# Altium PCB AD.PcbDoc
Units mm, origin at the board's own origin, x right, y up, seen from the top; angles counter-clockwise.
Board outline 130.05 x 90.05 mm, 2 copper layers (Top Layer, Bottom Layer); 7 components, 14 nets, 109 pads, 0 vias.
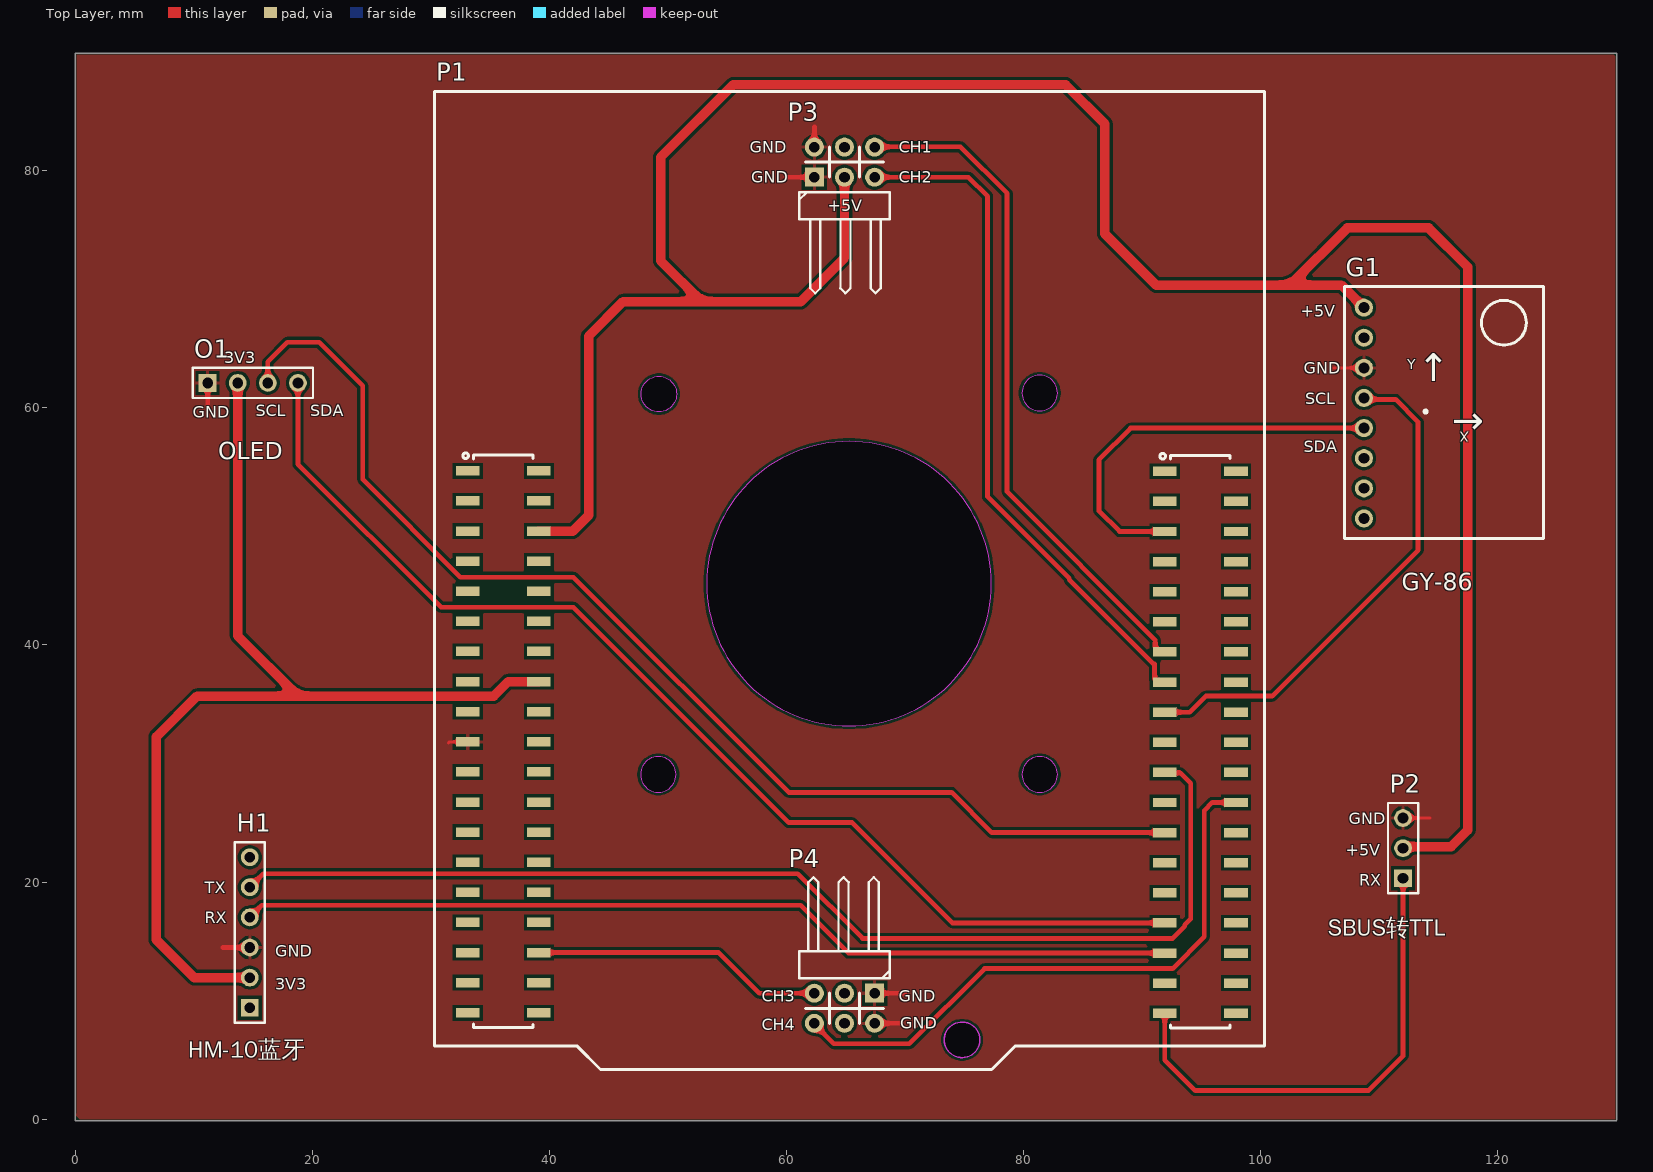
[diagram p0: Top Layer view]
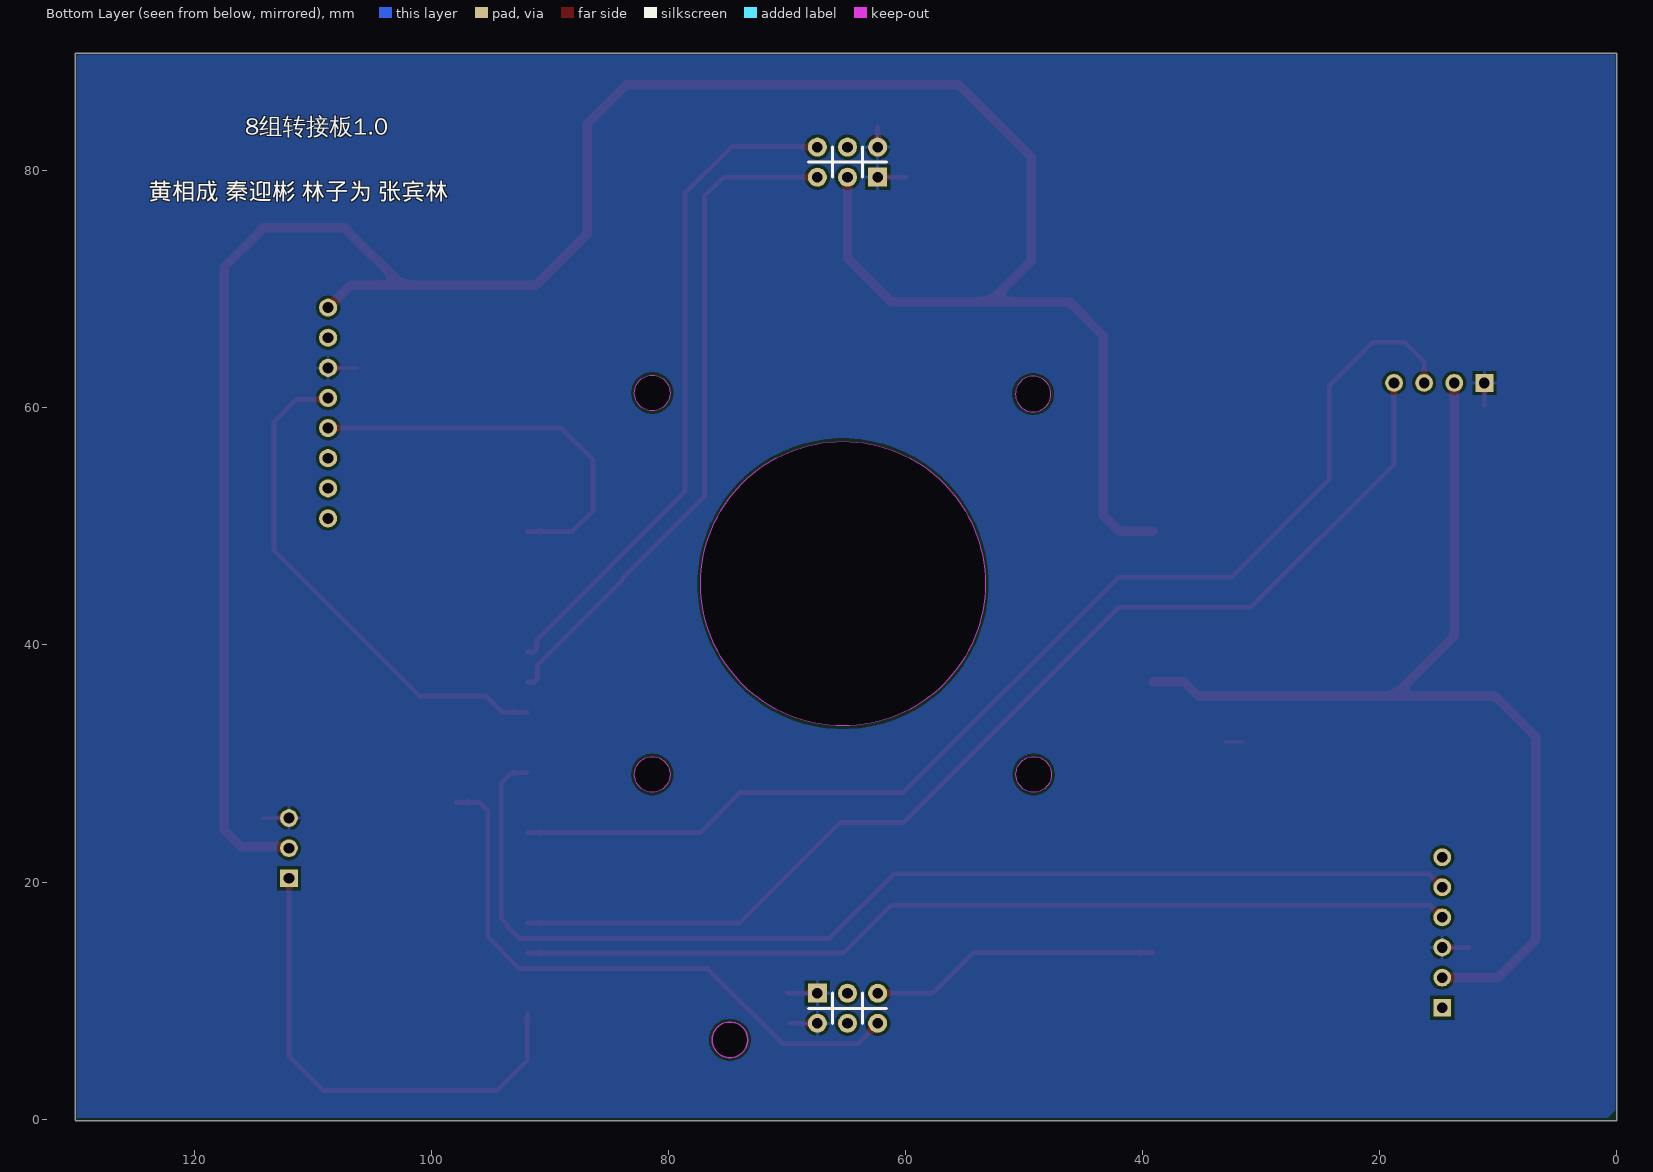
[diagram p1: Bottom Layer view, seen from below]

## Layer stack, top to bottom
Top Solder: solder mask 0.0102, Solder Resist, Dk 3.5
Top Layer: signal copper 0.0356
Dielectric 1: dielectric 0.32, FR-4, Dk 4.8
Bottom Layer: signal copper 0.0356
Bottom Solder: solder mask 0.0102, Solder Resist, Dk 3.5

## Board outline
0,-0.127 130,-0.127 130.048,-0.079 130.048,89.921 130,89.916 0,89.916
cut-out: 49.237,59.661 cw(c49.237,61.161) 47.737,61.161 cw(c49.237,61.161) 49.237,62.661 cw(c49.237,61.161) 50.737,61.161 cw(c49.237,61.161)
cut-out: 47.691,29.079 ccw(c49.191,29.079) 49.191,27.579 ccw(c49.191,29.079) 50.691,29.079 ccw(c49.191,29.079) 49.191,30.579 ccw(c49.191,29.079)
cut-out: 79.865,61.253 ccw(c81.365,61.253) 81.365,59.753 ccw(c81.365,61.253) 82.865,61.253 ccw(c81.365,61.253) 81.365,62.753 ccw(c81.365,61.253)
cut-out: 79.865,29.079 ccw(c81.365,29.079) 81.365,27.579 ccw(c81.365,29.079) 82.865,29.079 ccw(c81.365,29.079) 81.365,30.579 ccw(c81.365,29.079)
cut-out: 53.278,45.166 ccw(c65.278,45.166) 65.278,33.166 ccw(c65.278,45.166) 77.278,45.166 ccw(c65.278,45.166) 65.278,57.166 ccw(c65.278,45.166)

## Design rules (kind name [scope] priority, off if disabled: settings)
Clearance GND_Polygon_Clearance [InNet('GND')] p1: gap=0.25 ignorepadtopadclearanceinfootprint=FALSE
Clearance [All] p2: gap=0.2 ignorepadtopadclearanceinfootprint=FALSE
PolygonConnect PolygonGND [InNet('GND')] p1: connectstyle=Relief reliefconductorwidth=0.3 reliefentries=4 polygonreliefangle="90 Angle" airgapwidth=0.25
PolygonConnect [All] p2: connectstyle=Relief reliefconductorwidth=0.254 reliefentries=4 polygonreliefangle="90 Angle" airgapwidth=0.254
RoutingVias [All] p1: holewidth=0.3 width=0.6 viastyle="Through Hole" minholewidth=0.3 minwidth=0.5 maxholewidth=0.8 maxwidth=1
SolderMaskExpansion [All] p1: expansion=0.102 istentingtop=FALSE
SupplyNets "Schematic Supply Nets_2" [InNet('+3V3')] p1: voltage=0.000
SupplyNets "Schematic Supply Nets_1" [InNet('+5')] p2: voltage=0.000
SupplyNets "Schematic Supply Nets" [InNet('GND')] p3: voltage=0.000
Width Width_PWR [InNetClass('PWR')] p1: maxlimit=2 minlimit=0.2 preferedwidth=0.8
Width Width_INF [InNetClass('INF')] p2: maxlimit=0.4 minlimit=0.2 preferedwidth=0.2
Width Width_PWM [InNetClass('PWM')] p3: maxlimit=0.4 minlimit=0.2 preferedwidth=0.2
Width [All] p4: maxlimit=0.254 minlimit=0.254 preferedwidth=0.254
30 further rules are at their usual default settings.

## Classes and differential pairs
net class PWM: TIM3_CH1 TIM3_CH2 TIM3_CH3 TIM3_CH4
net class INF: I2C1_SCL I2C1_SDA I2C2_SCL I2C2_SDA USART1_RX USART1_TX USART2_RX
net class PWR: +3V3 +5 GND

## Components (designator, comment, footprint, x,y, rotation, side; value= is the part's Value field where it differs from the comment)
G1 "GY-86" GY-86 113.792,59.563 r0 top
H1 "HM-10" HDR1X6 14.732,9.398 r90 top
O1 "OLED" HDR1X4 11.176,62.103 r0 top
P1 "NUCLEO-64" NUCLEO-F103RB 100.316,86.691 r270 top
P2 "SBUS转TTL" HDR1X3 112.014,20.32 r90 top
P3 "PWM" HDR2.54-WI-2x3P 64.897,80.726 r0 top
P4 "PWM" HDR2.54-WI-2x3P 64.897,9.352 r180 top

## Footprints (in the part's own frame and the unit in brackets; to place one, negate y for a bottom-side part, rotate by r counter-clockwise, add the part's x,y. Pads: shape width x height; smd on the part's side, far side on the other; paste and mask are expansions set on the pad)
GY-86 [mil]
  round 60 hole 36: 1(-200,350) 2(-200,250) 3(-200,150) 4(-200,50) 5(-200,-50) 6(-200,-150) 7(-200,-250) 8(-200,-350)
  silkscreen extent -265,-416 396,420
HDR1X3 [mm] "Connector; Header; 3 Position"
  rect 1.5x1.5 hole 0.9: 1(0,0)
  round 1.5 hole 0.9: 2(2.54,0) 3(5.08,0)
  silkscreen extent -1.27,-1.27 6.35,1.27, body extent -1.27,-1.27 6.35,1.27, height 8.5
HDR1X4 [mm] "Connector; Header; 4 Position"
  rect 1.5x1.5 hole 0.9: 1(0,0)
  round 1.5 hole 0.9: 2(2.54,0) 3(5.08,0) 4(7.62,0)
  silkscreen extent -1.27,-1.27 8.89,1.27
HDR1X6 [mm] "Connector; Header; 6 Position"
  rect 1.5x1.5 hole 0.9: 1(0,0)
  round 1.5 hole 0.9: 2(2.54,0) 3(5.08,0) 4(7.62,0) 5(10.16,0) 6(12.7,0)
  silkscreen extent -1.27,-1.27 13.97,1.27, body extent -1.27,-1.27 13.97,1.27, height 8.5
HDR2.54-WI-2x3P [mm] "双排弯脚排针，3x2脚"
  rect 1.6x1.6 hole 0.9: 1(-2.54,-1.27)
  round 1.6 hole 0.9: 2(-2.54,1.27) 3(0,-1.27) 4(0,1.27) 5(2.54,-1.27) 6(2.54,1.27)
  silkscreen extent -3.81,-11.06 3.81,1.27, body extent -3.81,-10.49 3.81,2.36, height 5.1
NUCLEO-F103RB [mm]
  rect 0.8x2 smd paste+0 mask+0.051: 1(32,-67.2) 2(32,-61.2) 3(34.54,-67.2) 4(34.54,-61.2) 5(37.08,-67.2) 6(37.08,-61.2) 7(39.62,-67.2) 8(39.62,-61.2) 9(42.16,-67.2) 10(42.16,-61.2) 11(44.7,-67.2) 12(44.7,-61.2) 13(47.24,-67.2) 14(47.24,-61.2) 15(49.78,-67.2) 16(49.78,-61.2) 17(52.32,-67.2) 18(52.32,-61.2) 19(54.86,-67.2) 20(54.86,-61.2) 21(57.4,-67.2) 22(57.4,-61.2) 23(59.94,-67.2) 24(59.94,-61.2) 25(62.48,-67.2) 26(62.48,-61.2) 27(65.02,-67.2) 28(65.02,-61.2) 29(67.56,-67.2) 30(67.56,-61.2) 31(70.1,-67.2) 32(70.1,-61.2) 33(72.64,-67.2) 34(72.64,-61.2) 35(75.18,-67.2) 36(75.18,-61.2) 37(77.72,-67.2) 38(77.72,-61.2) 73(32.04,-8.4) 74(32.04,-2.4) 75(34.58,-8.4) 76(34.58,-2.4) 77(37.12,-8.4) 78(37.12,-2.4) 79(39.66,-8.4) 80(39.66,-2.4) 81(42.2,-8.4) 82(42.2,-2.4) 83(44.74,-8.4) 84(44.74,-2.4) 85(47.28,-8.4) 86(47.28,-2.4) 87(49.82,-8.4) 88(49.82,-2.4) 89(52.36,-8.4) 90(52.36,-2.4) 91(54.9,-8.4) 92(54.9,-2.4) 93(57.44,-8.4) 94(57.44,-2.4) 95(59.98,-8.4) 96(59.98,-2.4) 97(62.52,-8.4) 98(62.52,-2.4) 99(65.06,-8.4) 100(65.06,-2.4) 101(67.6,-8.4) 102(67.6,-2.4) 103(70.14,-8.4) 104(70.14,-2.4) 105(72.68,-8.4) 106(72.68,-2.4) 107(75.22,-8.4) 108(75.22,-2.4) 109(77.76,-8.4) 110(77.76,-2.4)
  Keep-Out Layer board cut-out: 81.5,-25.5 81.5,-25.648 81.442,-25.938 81.329,-26.211 81.165,-26.456 80.956,-26.665 80.71,-26.829 80.437,-26.942 80.148,-27 79.852,-27 79.562,-26.942 79.289,-26.829 79.044,-26.665 78.835,-26.456 78.671,-26.211 78.557,-25.938 78.5,-25.648 78.5,-25.5 78.5,-25.352 78.557,-25.063 78.671,-24.79 78.835,-24.544 79.044,-24.335 79.289,-24.171 79.562,-24.058 79.852,-24 80.148,-24 80.437,-24.058 80.71,-24.171 80.956,-24.335 81.165,-24.544 81.329,-24.79 81.442,-25.063 81.5,-25.352 81.5,-25.5 81.5,-25.5
  Keep-Out Layer circle w0.003: c80,-25.5 r1.5
  Keep-Out Layer region: 81.5,-25.5 81.49,-25.674 81.459,-25.846 81.409,-26.013 81.34,-26.173 81.253,-26.324 81.149,-26.464 81.029,-26.591 80.896,-26.703 80.75,-26.799 80.594,-26.877 80.43,-26.937 80.26,-26.977 80.087,-26.998 79.913,-26.998 79.739,-26.977 79.57,-26.937 79.406,-26.877 79.25,-26.799 79.104,-26.703 78.97,-26.591 78.851,-26.464 78.747,-26.324 78.659,-26.173 78.59,-26.013 78.54,-25.846 78.51,-25.674 78.5,-25.5 78.51,-25.326 78.54,-25.154 78.59,-24.987 78.659,-24.827 78.747,-24.676 78.851,-24.536 78.97,-24.409 79.104,-24.297 79.25,-24.201 79.406,-24.123 79.57,-24.063 79.739,-24.023 79.913,-24.003 80.087,-24.003 80.26,-24.023 80.43,-24.063 80.594,-24.123 80.75,-24.201 80.896,-24.297 81.029,-24.409 81.149,-24.536 81.253,-24.676 81.34,-24.827 81.409,-24.987 81.459,-25.154 81.49,-25.326 81.5,-25.5
  Keep-Out Layer region: 81.5,-25.5 81.5,-25.648 81.442,-25.938 81.329,-26.211 81.165,-26.456 80.956,-26.665 80.71,-26.829 80.437,-26.942 80.148,-27 79.852,-27 79.562,-26.942 79.289,-26.829 79.044,-26.665 78.835,-26.456 78.671,-26.211 78.557,-25.938 78.5,-25.648 78.5,-25.5 78.5,-25.352 78.557,-25.063 78.671,-24.79 78.835,-24.544 79.044,-24.335 79.289,-24.171 79.562,-24.058 79.852,-24 80.148,-24 80.437,-24.058 80.71,-24.171 80.956,-24.335 81.165,-24.544 81.329,-24.79 81.442,-25.063 81.5,-25.352 81.5,-25.5 81.5,-25.5
  silkscreen extent 0,-70 82.5,0

## Part data
G1: "GY-86模块", AddInBom=yes, Device=GY-86, FootprintName=GY-86, Symbol=GY-86
H1: "HM-10蓝牙模块", LatestRevisionDate=17-Jul-2002, LatestRevisionNote="Re-released for DXP Platform.", Publisher="Altium Limited"
O1: "使用I2C通信的0.96寸OLED模块", LatestRevisionDate=17-Jul-2002, LatestRevisionNote="Re-released for DXP Platform.", Publisher="Altium Limited"
P1: "STM32F401NUCLEO开发板", Manufacturer=ST, AddInBom=yes, Device=NUCLEO-64, FootprintName=NUCLEO-F103RB, Supplier=Mouser, SupplierPart=NUCLEO-F103rb, Symbol=NUCLEO-64
P2: "SBUS转TTL模块", LatestRevisionDate=17-Jul-2002, LatestRevisionNote="Re-released for DXP Platform.", Publisher="Altium Limited"
P3 P4: "电机PWM输出", LatestRevisionDate=17-Jul-2002, LatestRevisionNote="Re-released for DXP Platform.", Publisher="Altium Limited"

## Nets (pads, with @x,y where several pads share a name; then routed paths per layer and width w, separated by ;. In a path a pad name is that pad's centre, name@x,y a point inside that pad or via, vN(x,y) a via of type N, cw(c..) or ccw(c..) an arc to the next point about the centre after c; other vN are vias at no path point)
+3V3: H1.2 O1.2 P1.16 | length 89
  Top Layer w0.8: O1.2 13.716,40.767 18.796,35.687 ; H1.2 10.033,11.938 6.858,15.113 6.858,32.258 10.287,35.687 18.796,35.687 ; P1.16 36.53,36.911 35.306,35.687 18.796,35.687
+5: G1.1 P1.6 P2.2 P3.3 | length 211.6
  Top Layer w0.8: P1.6 41.991,49.611 43.307,50.927 43.307,66.04 46.228,68.961 52.832,68.961 ; P3.3 64.897,72.644 61.214,68.961 52.832,68.961 ; G1.1 106.807,70.358 102.489,70.358 ; P2.2 112.141,22.987 116.078,22.987 117.475,24.384 117.475,71.882 114.173,75.184 107.315,75.184 102.489,70.358 ; 52.832,68.961 49.403,72.39 49.403,81.153 55.499,87.249 83.566,87.249 86.868,83.947 86.868,74.676 91.186,70.358 102.489,70.358
GND: G1.3 H1.3 O1.1 P1.19 P2.3 P3.1 P3.2 P4.1 P4.2 | length 19.7
  Top Layer w0.254: 31.496,31.75 31.577,31.831 P1.19 ; 106.172,63.373 G1.3 ; P2.3 114.3,25.4
  Top Layer w0.4: 11.176,60.198 O1.1 ; 12.446,14.478 H1.3 ; 59.944,79.502 59.99,79.456 P3.1 ; P3.2 62.357,83.693 ; P4.2 69.677,8.082 69.723,8.128 ; P4.1 69.931,10.622 69.977,10.668
I2C1_SCL: G1.4 P1.89 | length 43.3
  Top Layer w0.4: P1.89 94.021,34.331 95.377,35.687 100.985,35.687 113.284,47.986 113.284,58.801 111.379,60.706 108.839,60.706 G1.4
I2C1_SDA: G1.5 P1.77 | length 34.1
  Top Layer w0.4: P1.77 88.097,49.571 86.36,51.308 86.36,55.626 89.027,58.293 G1.5
I2C2_SCL: O1.3 P1.97 | length 99.9
  Top Layer w0.4: O1.3 16.256,63.881 17.907,65.532 20.574,65.532 24.257,61.849 24.257,53.964 32.501,45.72 42.037,45.72 60.198,27.559 73.926,27.559 77.314,24.171 P1.97
I2C2_SDA: O1.4 P1.103 | length 96
  Top Layer w0.4: O1.4 18.796,55.245 30.861,43.18 42.037,43.18 60.198,25.019 65.532,25.019 74,16.551 P1.103
TIM3_CH1: P1.85 P3.6 | length 57.4
  Top Layer w0.4: P3.6 67.461,82.02 74.676,82.02 78.613,78.083 78.613,52.914 91.116,40.411 91.116,39.611 91.316,39.411 P1.85
TIM3_CH2: P1.87 P3.5 | length 57.8
  Top Layer w0.4: P3.5 75.357,79.456 76.962,77.851 76.962,52.502 83.856,45.608 83.856,45.505 90.94,38.422 91.043,38.422 91.043,37.144 91.316,36.871 P1.87
TIM3_CH3: P1.34 P4.5 | length 24.7
  Top Layer w0.4: P1.34 54.275,14.051 57.704,10.622 P4.5
TIM3_CH4: P1.96 P4.6 | length 51
  Top Layer w0.4: P4.6 62.357,8.001 64.008,6.35 70.358,6.35 76.708,12.7 92.571,12.7 95.25,15.379 95.25,26.035 95.926,26.711 P1.96
USART1_RX: H1.4 P1.105 | length 79.3
  Top Layer w0.4: H1.4 15.748,18.034 61.214,18.034 65.237,14.011 P1.105
USART1_TX: H1.5 P1.93 | length 96.9
  Top Layer w0.4: H1.5 15.875,20.701 60.96,20.701 66.421,15.24 92.571,15.24 93.594,16.264 93.594,16.378 94.107,16.891 94.107,28.321 93.218,29.21 91.957,29.21 P1.93
USART2_RX: P1.109 P2.1 | length 41.3
  Top Layer w0.4: P1.109 91.916,4.985 94.488,2.413 109.093,2.413 112.014,5.334 P2.1
pads on no net: G1.2 G1.6 G1.7 G1.8 H1.1 H1.6 P1.1 P1.2 P1.3 P1.4 P1.5 P1.7 P1.8 P1.9 P1.10 P1.11 P1.12 P1.13 P1.14 P1.15 P1.17 P1.18 P1.20 P1.21 P1.22 P1.23 P1.24 P1.25 P1.26 P1.27 P1.28 P1.29 P1.30 P1.31 P1.32 P1.33 P1.35 P1.36 P1.37 P1.38 P1.73 P1.74 P1.75 P1.76 P1.78 P1.79 P1.80 P1.81 P1.82 P1.83 P1.84 P1.86 P1.88 P1.90 P1.91 P1.92 P1.94 P1.95 P1.98 P1.99 P1.100 P1.101 P1.102 P1.104 P1.106 P1.107 P1.108 P1.110 P3.4 P4.3 P4.4

## Polygon pours and split planes (outlines as drawn)
GND on Bottom Layer "GND_L02_P001" (solid, remove dead copper, pour order 1): 0.127,89.789 129.794,89.789 129.921,89.662 129.921,0.127 0.762,0.127 0.127,0.762 0.127,89.916
GND on Top Layer "GND_L01_P000" (solid, remove dead copper, pour order 0): 0.127,89.789 129.794,89.789 129.921,89.662 129.921,0 0.381,0 0,0.381 0.127,0.508

## Silkscreen, mask and mechanical layers (free items; w line width, h text height)
Top Overlay:
  text "GND" at 56.896,81.534 h1
  text "CH1" at 69.469,81.534 h1
  text "GND" at 57.023,78.994 h1
  text "CH2" at 69.469,78.994 h1
  text "+5V" at 63.5,76.581 h1
  text "+5V" at 103.378,67.691 h1
  text "3V3" at 12.573,63.754 h1
  text "GND" at 103.632,62.865 h1
  text "SCL" at 103.759,60.325 h1
  text "SCL" at 15.24,59.309 h1
  text "SDA" at 19.812,59.309 h1
  text "GND" at 9.906,59.182 h1
  text "SDA" at 103.632,56.261 h1
  text "OLED" at 12.065,55.145 h2.5
  text "GY-86" at 111.887,44.096 h2.5
  text "GND" at 107.442,24.892 h1
  text "+5V" at 107.188,22.225 h1
  text "RX" at 108.331,19.685 h1
  text "TX" at 10.922,19.05 h1
  text "RX" at 10.922,16.51 h1
  text "SBUS转TTL" at 105.664,14.951 h2.5
  text "GND" at 16.891,13.716 h1
  text "3V3" at 16.891,10.922 h1
  text "CH3" at 57.912,9.906 h1
  text "GND" at 69.469,9.906 h1
  text "GND" at 69.596,7.62 h1
  text "CH4" at 57.912,7.493 h1
  text "HM-10蓝牙" at 9.525,4.654 h2.5
Bottom Overlay:
  text "8组转接板1.0" at 115.697,82.532 h2.5
  text "黄相成 秦迎彬 林子为 张宾林" at 123.825,77.062 h2.5
Mechanical 1:
  pour cut-out: 53.278,45.166 ccw(c65.278,45.166) 65.278,33.166 ccw(c65.278,45.166) 77.278,45.166 ccw(c65.278,45.166) 65.278,57.166 ccw(c65.278,45.166)
  pour cut-out: 53.048,44.982 ccw(c65.048,44.982) 65.048,32.982 ccw(c65.048,44.982) 77.048,44.982 ccw(c65.048,44.982) 65.048,56.982 ccw(c65.048,44.982)

## Dimensions
0,-0.254 to 0,89.916 on Top Overlay
0,-0.254 to 130,-0.127 on Top Overlay

## Text inside footprints (layer, text, board x,y; h text height)
G1: Top Overlay "↑" at 115.546,60.167 h4 r270; Top Overlay "↑" at 113.26,61.437 h4; Top Overlay "Y" at 112.371,62.961 h1.5; Top Overlay "X" at 117.578,58.293 h1.5 r180